# Altium PCB PCB版图.PcbDoc
Units mil, origin at the board's own origin, x right, y up, seen from the top; angles counter-clockwise.
Board outline 2955 x 3910 mil, 2 copper layers (Top Layer, Bottom Layer); 32 components, 37 nets, 114 pads, 5 vias.
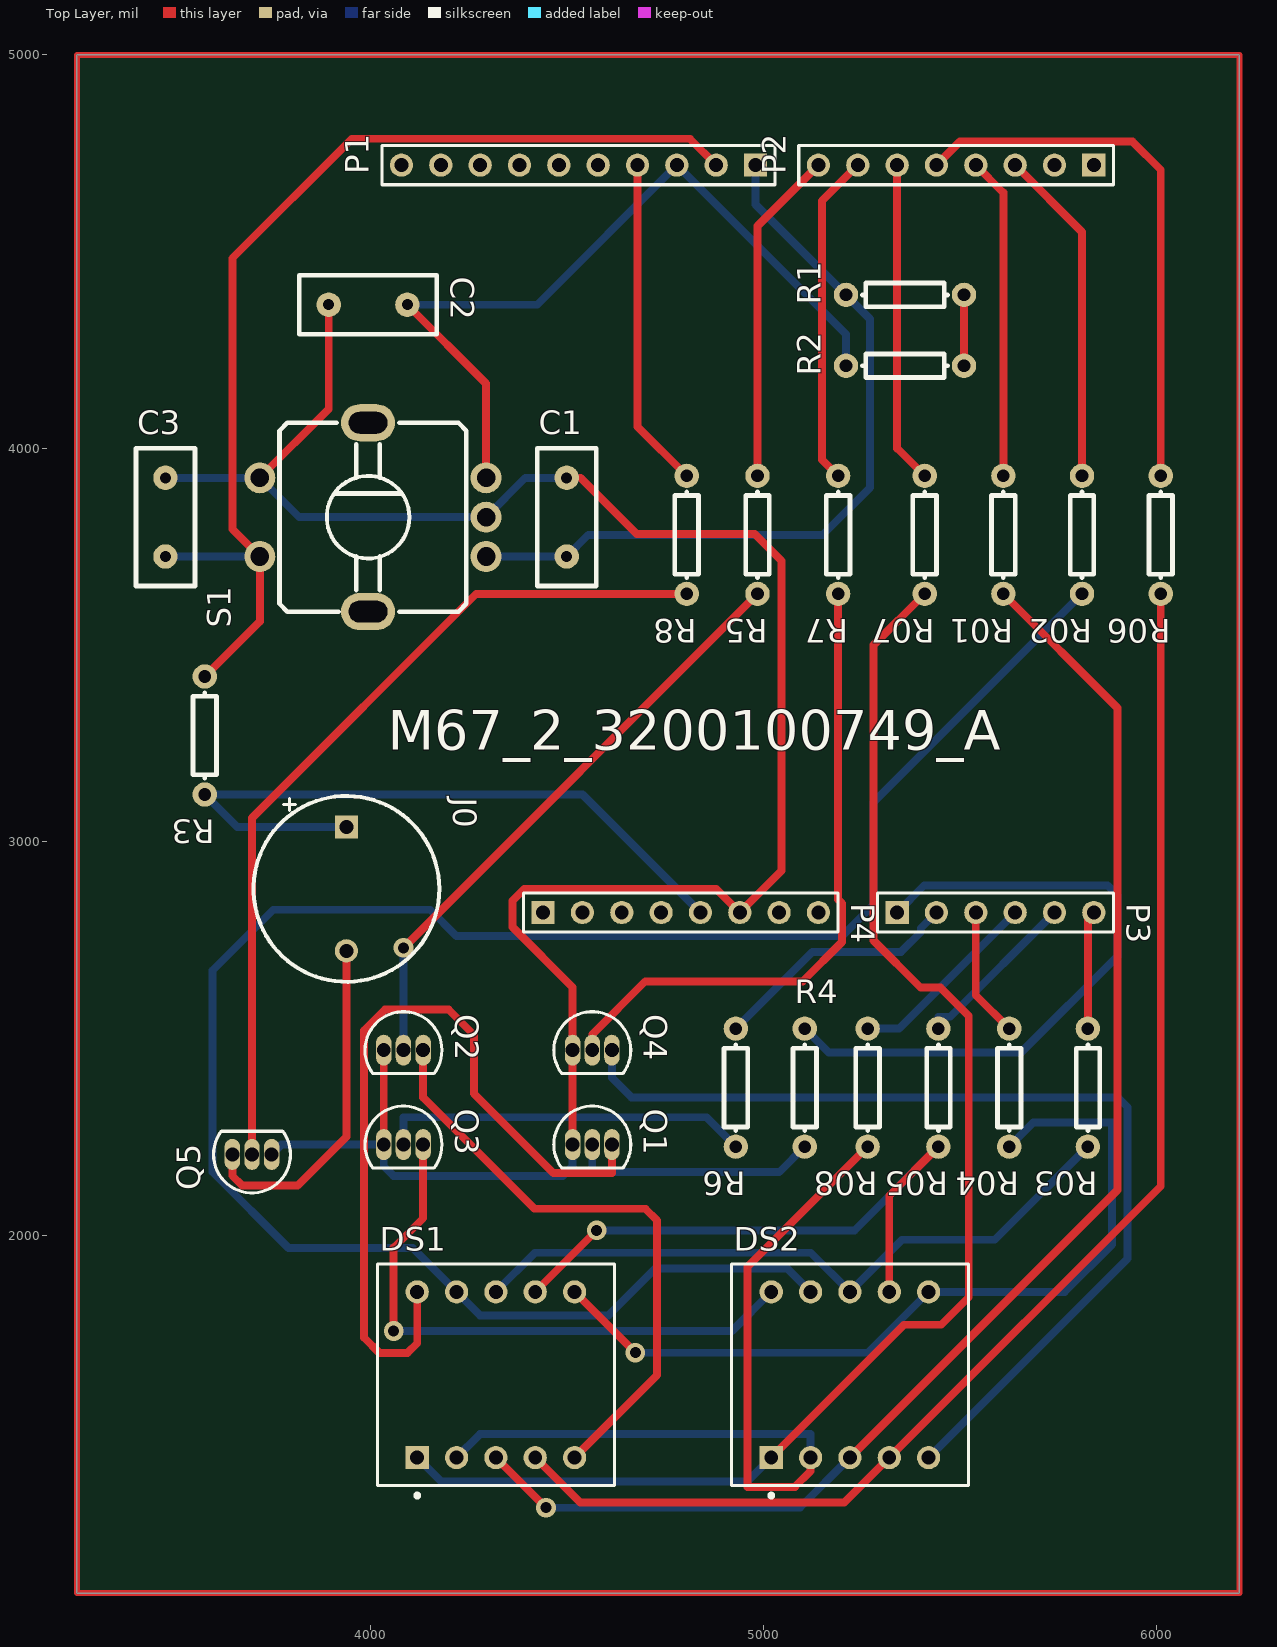
[diagram p0: Top Layer view]
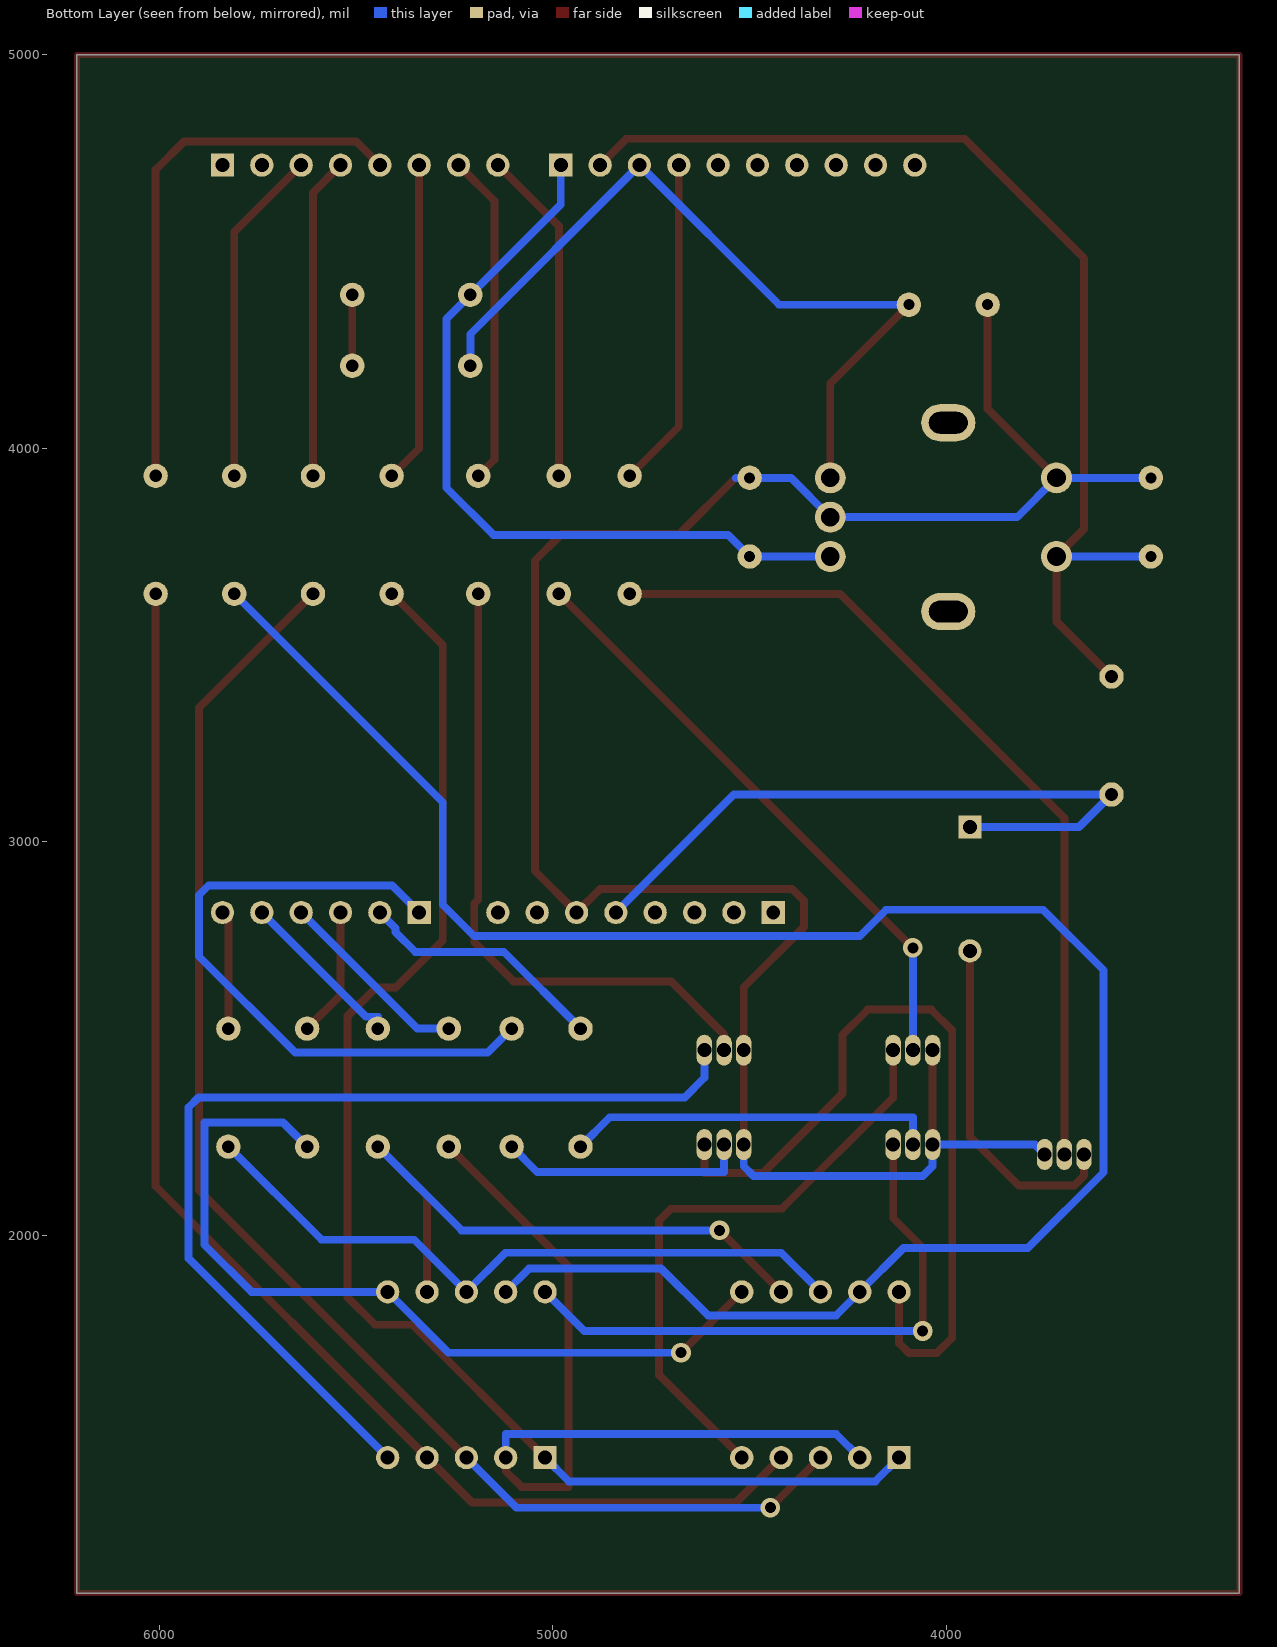
[diagram p1: Bottom Layer view, seen from below]

## Layer stack, top to bottom
Top Solder: solder mask 0.4, Solder Resist, Dk 3.5
Top Layer: signal copper 1.4
Dielectric1: dielectric 12.6, FR-4, Dk 4.8
Bottom Layer: signal copper 1.4
Bottom Solder: solder mask 0.4, Solder Resist, Dk 3.5

## Board outline
3255,5000 6210,5000 6210,1090 3255,1090

## Design rules (kind name [scope] priority, off if disabled: settings)
Clearance [All] p1: gap=20 ignorepadtopadclearanceinfootprint=FALSE except(0: Arc-Hole Track-Hole SMDPad-Hole THPad-Hole Via-Hole Fill-Hole Poly-Hole Region-Hole Text-Hole)
FabricationTestPointUsage TestPointUsage [All] p1: valid=0 allowmultiple=FALSE
FabricationTestpoint Testpoint [All] p1: side=3 testpointundercomponent=TRUE minsize=40 maxsize=100 preferedsize=60 minholesize=0 maxholesize=40 preferedholesize=32 testpointgrid=1 allowsidetop=TRUE allowsidebottom=TRUE usegrid=TRUE gridtolerance=0.01
PolygonConnect [All] p1: connectstyle=Relief reliefconductorwidth=10 reliefentries=4 polygonreliefangle="90 Angle" airgapwidth=10
RoutingVias [All] p1: holewidth=28 width=50 viastyle="Through Hole" minholewidth=28 minwidth=50 maxholewidth=28 maxwidth=50
SilkToSolderMaskClearance SilkscreenOverComponentPads [IsPad] p1: minsilkscreentomaskgap=10 clearancetoexposedcopper=TRUE
SolderMaskExpansion [All] p1: expansion=4 istentingtop=FALSE
Width [All] p1: maxlimit=30 minlimit=15 preferedwidth=20 minimp=50.000000 maximp=50.000000 favimp=50.000000
27 further rules are at their usual default settings.

## Components (designator, comment, footprint, x,y, rotation, side; value= is the part's Value field where it differs from the comment)
C1 "Cap" RAD0.2 4500,3725 r90 top
C2 "Cap" RAD0.2 3895,4365 r0 top
C3 "Cap" RAD0.2 3480,3725 r90 top
DS1 "HDSM-577G" HDSM-577 4320,1645 r0 top
DS2 "HDSM-577G" HDSM-577 5220,1645 r0 top
J0 "BEEP" Beep 3940,2880 r270 top
P1 "Header 10H" HDR1X10 4980,4720 r180 top
P2 "Header 8H" HDR1X8 5840,4720 r180 top
P3 "Header 6H" HDR1X6 5340,2820 r0 top
P4 "Header 8H" HDR1X8 4440,2820 r0 top
Q1 "S8050" TO-92A 4565,2230 r270 top
Q2 "S8050" TO-92A 4085,2470 r270 top
Q3 "S8050" TO-92A 4085,2230 r270 top
Q4 "S8050" TO-92A 4565,2470 r270 top
Q5 "S8050" TO-92A 3700,2205 r90 top
R01 "Res1" AXIAL0.3 5610,3930 r270 top
R1 "Res1" AXIAL0.3 5510,4390 r180 top
R02 "Res1" AXIAL0.3 5810,3930 r270 top
R2 "Res1" AXIAL0.3 5510,4210 r180 top
R03 "Res1" AXIAL0.3 5825,2525 r270 top
R3 "Res1" AXIAL0.3 3580,3420 r270 top
R04 "Res1" AXIAL0.3 5625,2525 r270 top
R4 "Res1" AXIAL0.3 5105,2225 r90 top
R05 "Res1" AXIAL0.3 5445,2525 r270 top
R5 "Res1" AXIAL0.3 4985,3930 r270 top
R06 "Res1" AXIAL0.3 6010,3930 r270 top
R6 "Res1" AXIAL0.3 4930,2525 r270 top
R07 "Res1" AXIAL0.3 5410,3930 r270 top
R7 "Res1" AXIAL0.3 5190,3930 r270 top
R08 "Res1" AXIAL0.3 5265,2525 r270 top
R8 "Res1" AXIAL0.3 4805,3930 r270 top
S1 "SW-EC11" EC11 3995,3825 r90 top

## Footprints (in the part's own frame and the unit in brackets; to place one, negate y for a bottom-side part, rotate by r counter-clockwise, add the part's x,y. Pads: shape width x height; smd on the part's side, far side on the other; paste and mask are expansions set on the pad)
AXIAL0.3 [mil]
  round 62 hole 32: 1(0,0) 2(300,0)
  silkscreen extent 41,-30 259,30
Beep [mm] "蜂鸣器"
  rect 1.5x1.5 hole 0.9: 1(-4,0)
  round 1.5 hole 0.9: 2(4,0)
  silkscreen extent -6,-6 6,6
EC11 [mm]
  round 2 hole 1.2: 1(-2.54,-7.62) 2(0,-7.62) 3(2.54,-7.62) 4(2.54,6.985) 5(-2.54,6.985)
  oval 2.4x3.5 hole 1.4 slot 2.5 at 90 deg: 6(-6.096,0) 7(6.096,0)
  silkscreen extent -6.1,-6.35 6.1,5.71
HDR1X6 [mm] "Connector; Header; 6 Position"
  rect 1.5x1.5 hole 0.9: 1(0,0)
  round 1.5 hole 0.9: 2(2.54,0) 3(5.08,0) 4(7.62,0) 5(10.16,0) 6(12.7,0)
  silkscreen extent -1.27,-1.27 13.97,1.27
HDR1X8 [mm] "Connector; Header; 8 Position"
  rect 1.5x1.5 hole 0.9: 1(0,0)
  round 1.5 hole 0.9: 2(2.54,0) 3(5.08,0) 4(7.62,0) 5(10.16,0) 6(12.7,0) 7(15.24,0) 8(17.78,0)
  silkscreen extent -1.27,-1.27 19.05,1.27
HDR1X10 [mm] "Connector; Header; 10 Position"
  rect 1.5x1.5 hole 0.9: 1(0,0)
  round 1.5 hole 0.9: 2(2.54,0) 3(5.08,0) 4(7.62,0) 5(10.16,0) 6(12.7,0) 7(15.24,0) 8(17.78,0) 9(20.32,0) 10(22.86,0)
  silkscreen extent -1.27,-1.27 24.13,1.27
HDSM-577 [mm] "LED, 7-Segment Display, 9.2 mm, Dual Digit; 10 Leads; Row Space 10.7 mm; Pitch 2.54 mm"
  rect 1.5x1.5 hole 0.9: 1(-5.08,-5.35)
  round 1.5 hole 0.9: 2(-2.54,-5.35) 3(0,-5.35) 4(2.54,-5.35) 5(5.08,-5.35) 6(5.08,5.35) 7(2.54,5.35) 8(0,5.35) 9(-2.54,5.35) 10(-5.08,5.35)
  silkscreen extent -7.65,-7.92 7.65,7.15
RAD0.2 [mil]
  round 62 hole 28: 1(0,0) 2(200,0)
  silkscreen extent -75,-75 275,75
TO-92A [mm]
  oval 2x1 hole 0.9: 1(0,-1.27) 2(0,0) 3(0,1.27)
  silkscreen extent -2.48,-2.48 1.5,2.48

## Part data
C1 C2 C3: "无极性电容"
DS1 DS2: "9.2 mm Green 7-Segment Display: 2-Digit, RH DP"
J0: "蜂鸣器"
P1: "Header, 10-Pin, Right Angle"
P2 P4: "Header, 8-Pin, Right Angle"
P3: "Header, 6-Pin, Right Angle"
Q1 Q2 Q3 Q4 Q5: "NPN三极管"
R01 R1 R02 R2 R03 R3 R04 R4 R05 R5 R06 R6 R07 R7 R08 R8: "贴片电阻"
S1: "旋转编码开关"

## Via types
v1: diameter 50, hole 28, Top Layer to Bottom Layer, 5 vias

## Nets (pads, with @x,y where several pads share a name; then routed paths per layer and width w, separated by ;. In a path a pad name is that pad's centre, name@x,y a point inside that pad or via, vN(x,y) a via of type N, cw(c..) or ccw(c..) an arc to the next point about the centre after c; other vN are vias at no path point)
GND: C1.2 C2.1 C3.2 P4.6 Q1.1 Q2.1 Q3.1 Q4.1 Q5.1 S1.2 S1.4 | length 5631.4
  Top Layer w20: S1.4 3895,4100 C2.1 ; Q3.1 Q2.1 ; Q1.1 Q4.1 4515,2630 4362,2783 4362,2850 4392,2880 4880,2880 P4.6 5046,2926 5046,3714 4978,3782 4678,3782 4535,3925
  Bottom Layer w20: C3.2 S1.4 3820,3825 S1.2 4395,3925 C1.2 4535,3925 ; Q5.1 3775,2230 Q3.1 4035,2175 4060,2150 4490,2150 4515,2175 Q1.1
NetC1_1: C1.1 P1.1 R1.2 S1.1 | length 1989
  Bottom Layer w20: S1.1 C1.1 4555,3780 5151,3780 5271,3900 5271,4329 R1.2 4980,4620 P1.1
NetC2_2: C2.2 P1.3 R2.2 S1.3 | length 2043
  Top Layer w20: C2.2 4295,4165 S1.3
  Bottom Layer w20: C2.2 4425,4365 P1.3 5210,4290 R2.2
NetC3_1: C3.1 P1.2 R3.1 S1.5 | length 2773.7
  Top Layer w20: R3.1 3720,3560 S1.5 3650,3795 3650,4483 3954,4787 4813,4787 P1.2
  Bottom Layer w20: C3.1 S1.5
NetDS1_1: DS1.1 DS2.1 R07.2 | length 3592.2
  Top Layer w20: DS2.1 5357.63,1772 5452,1772 5522,1842 5522,2557 5450,2629 5400,2629 5280,2749 5280,3500 R07.2
  Bottom Layer w20: DS1.1 4180.37,1374 4959.63,1374 DS2.1
NetDS1_2: DS1.2 DS2.2 R08.2 | length 2186.6
  Top Layer w20: DS2.2 5120,1400 5080,1360 4960,1360 4960,1920 R08.2
  Bottom Layer w20: DS1.2 4279.63,1494 5120,1494 DS2.2
NetDS1_3: DS1.3 DS2.3 R01.2 | length 3602.9
  Top Layer w20: DS1.3 v1(4447.37,1307) ; DS2.3 5900,2114.37 5900,3340 R01.2
  Bottom Layer w20: v1(4447.37,1307) 5092.63,1307 DS2.3
NetDS1_4: DS1.4 DS2.4 R06.2 | length 3476.2
  Top Layer w20: DS1.4 4534.37,1320 5205.63,1320 DS2.4 6010,2124.37 R06.2
NetDS1_5: DS1.5 Q2.3 | length 1534.3
  Top Layer w20: Q2.3 4135,2350 4418,2067 4700,2067 4730,2037 4730,1644.37 DS1.5
NetDS1_6: DS1.6 DS2.6 R04.2 | length 2140.4
  Top Layer w20: DS1.6 v1(4674.63,1701)
  Bottom Layer w20: v1(4674.63,1701) 5265.37,1701 DS2.6 5766,1855.63 5886,1975.63 5886,2286 5686,2286 R04.2
NetDS1_7: DS1.7 DS2.7 R05.2 | length 1599.1
  Top Layer w20: DS1.7 v1(4576.37,2012) ; DS2.7 5320,2100 R05.2
  Bottom Layer w20: v1(4576.37,2012) 5232,2012 R05.2
NetDS1_8: DS1.8 DS2.8 R03.2 | length 1740.4
  Bottom Layer w20: DS1.8 4419.53,1955.16 5120.47,1955.16 DS2.8 5352.37,1988 5588,1988 R03.2
NetDS1_9: DS1.9 DS2.9 R02.2 | length 5072
  Bottom Layer w20: DS2.9 5060.47,1915.16 4725.16,1915.16 4606,1796 4279.63,1796 DS1.9 4108.63,1967 3793,1967 3600,2160 3600,2673 3754,2827 4153,2827 4220,2760 5200,2760 5280,2840 5280,3100 R02.2
NetDS1_10: DS1.10 Q1.3 | length 2056.3
  Top Layer w20: DS1.10 4120,1725 4095,1700 4024,1700 3985,1739 3985,2520 4038,2573 4200,2573 4264,2509 4264,2360 4466,2158 4615,2158 Q1.3
NetDS2_5: DS2.5 Q4.3 | length 2512.3
  Bottom Layer w20: Q4.3 4615,2400 4665,2350 5901,2350 5926,2325 5926,1940.37 DS2.5
NetDS2_10: DS2.10 Q3.3 | length 1506.3
  Top Layer w20: v1(4060,1756) 4060,1968 4135,2043 Q3.3
  Bottom Layer w20: v1(4060,1756) 4920.37,1756 DS2.10
NetJ0_1: J0.1 P4.5 R3.2 | length 1778.4
  Bottom Layer w20: J0.1 3662.52,3037.48 R3.2 4540,3120 P4.5
NetJ0_2: J0.2 Q5.3 | length 878.2
  Top Layer w20: Q5.3 3650,2151 3675,2126 3816,2126 3940,2250 J0.2
NetP1_4: P1.4 R8.1 | length 841.8
  Top Layer w20: P1.4 4680,4055 R8.1
NetP2_3: P2.3 R02.1 | length 860.4
  Top Layer w20: P2.3 5810,4550 R02.1
NetP2_4: P2.4 R01.1 | length 819
  Top Layer w20: P2.4 5610,4650 R01.1
NetP2_5: P2.5 R06.1 | length 1402.7
  Top Layer w20: P2.5 5500,4780 5938,4780 6010,4708 R06.1
NetP2_6: P2.6 R07.1 | length 819
  Top Layer w20: P2.6 5340,4000 R07.1
NetP2_7: P2.7 R7.1 | length 844.7
  Top Layer w20: R7.1 5149,3971 5149,4629 P2.7
NetP2_8: P2.8 R5.1 | length 854.2
  Top Layer w20: R5.1 4985,4565 P2.8
NetP3_1: P3.1 R4.2 | length 1675.7
  Bottom Layer w20: R4.2 5166,2464 5655,2464 5900,2709 5900,2864 5875,2889 5409,2889 P3.1
NetP3_2: P3.2 R6.1 | length 638.1
  Bottom Layer w20: R6.1 5125,2720 5350,2720 5400,2770 5400,2780 P3.2
NetP3_3: P3.3 R04.1 | length 330.2
  Top Layer w20: P3.3 5540,2610 R04.1
NetP3_4: P3.4 R08.1 | length 497.2
  Bottom Layer w20: R08.1 5345,2525 P3.4
NetP3_5: P3.5 R05.1 | length 434.8
  Bottom Layer w20: R05.1 5445,2555 5475,2555 P3.5
NetP3_6: P3.6 R03.1 | length 301.2
  Top Layer w20: R03.1 5825,2805 P3.6
NetQ1_2: Q1.2 R4.1 | length 636.9
  Bottom Layer w20: Q1.2 4565,2160 5040,2160 R4.1
NetQ2_2: Q2.2 R5.2 | length 1532.8
  Top Layer w20: v1(4085,2730) R5.2
  Bottom Layer w20: Q2.2 v1(4085,2730)
NetQ3_2: Q3.2 R6.2 | length 945.2
  Bottom Layer w20: Q3.2 4085,2299.37 4855.63,2299.37 R6.2
NetQ4_2: Q4.2 R7.2 | length 1661.5
  Top Layer w20: Q4.2 4565,2510 4700,2645 5100,2645 5200,2745 5200,2843 5190,2853 R7.2
NetQ5_2: Q5.2 R8.2 | length 2196.1
  Top Layer w20: Q5.2 3700,3060 4270,3630 R8.2
VCC: R1.1 R2.1 | length 180
  Top Layer w20: R2.1 R1.1
pads on no net: P1.5 P1.6 P1.7 P1.8 P1.9 P1.10 P2.1 P2.2 P4.1 P4.2 P4.3 P4.4 P4.7 P4.8 S1.6 S1.7
copper on no net: | length 13730
  Top Layer w15: 3255,1090 6210,1090 6210,5000 3255,5000 3255,1090

## Silkscreen, mask and mechanical layers (free items; w line width, h text height)
Top Overlay:
  text "M67_2_3200100749_A" at 4045.28,3233.35 h100